# Altium PCB ESP32 with USBC PCB V1I1.PcbDoc (part 3 of 3)
Units mil, origin at the board's own origin, x right, y up, seen from the top; angles counter-clockwise.
Board outline 3020 x 1968.5 mil, 4 copper layers (L1, L2, L3, L4), stack 61.581 mil thick; 65 components, 78 nets, 406 pads, 141 vias.
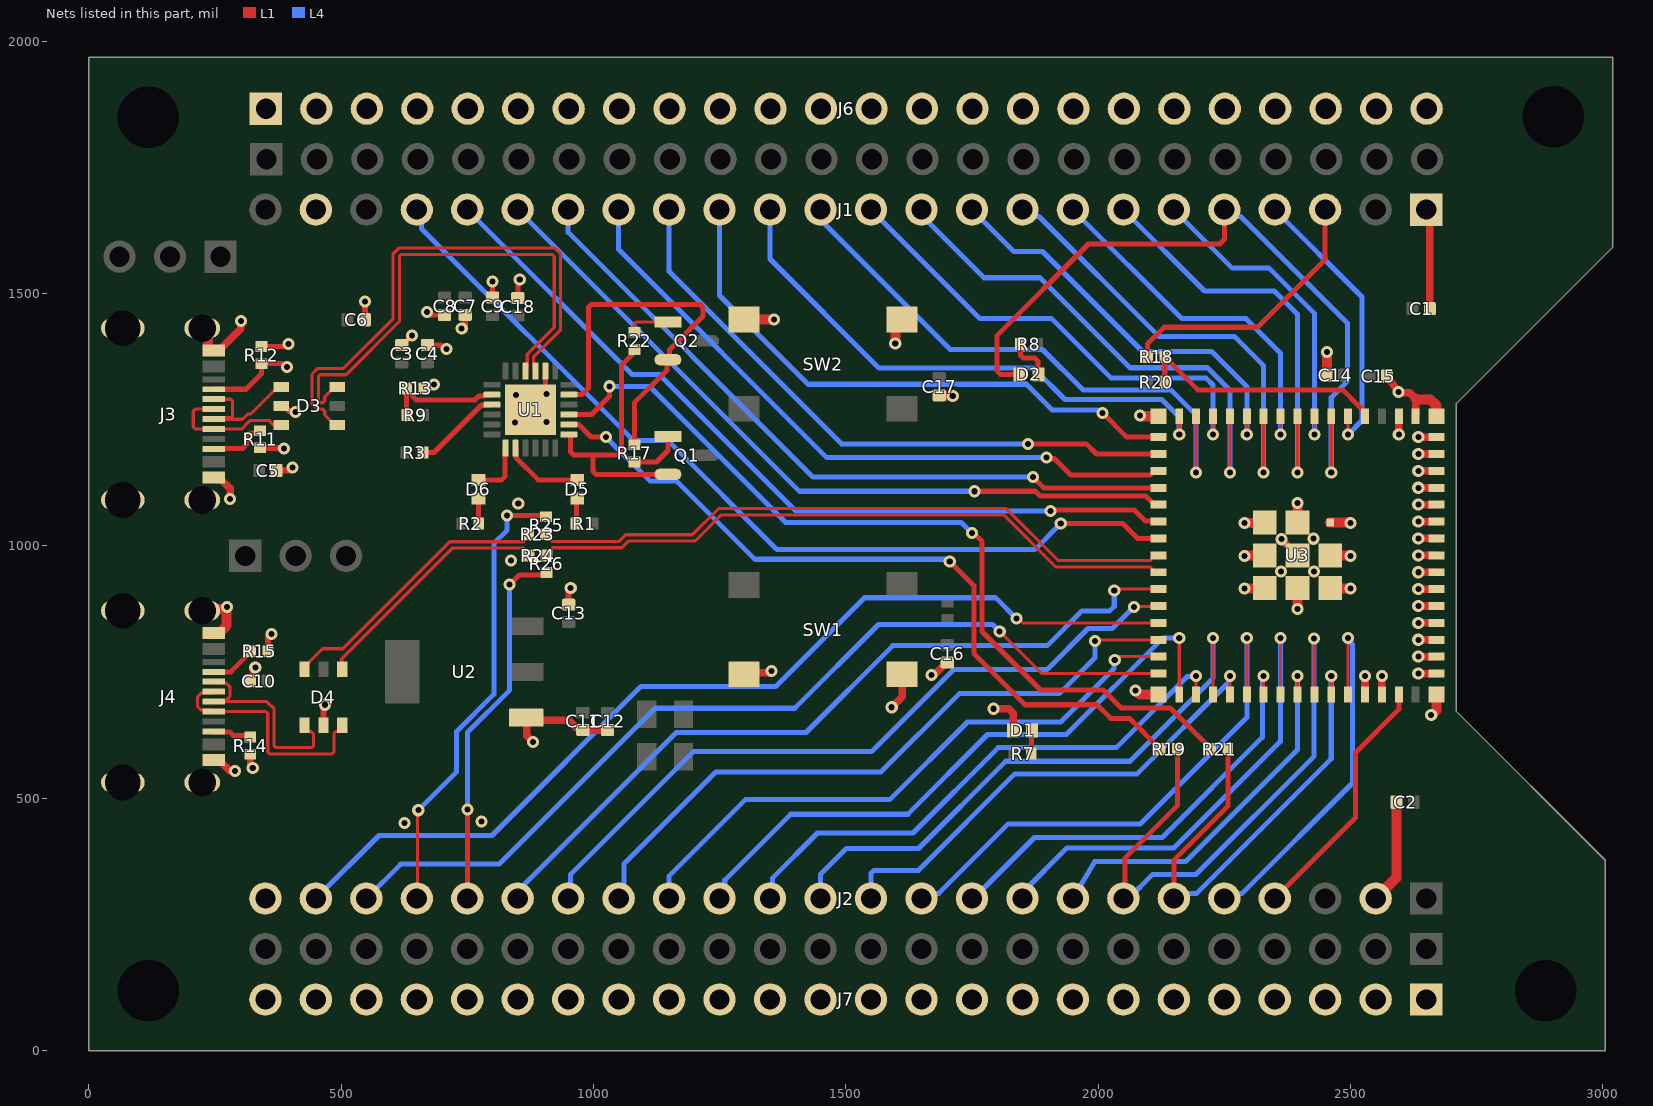
[diagram p4: the nets of this part, all layers, seen from the top]

## Via types
v1: diameter 24, hole 12, L1 to L4, tented both sides, 141 vias

## Nets (pads, with @x,y where several pads share a name; then routed paths per layer and width w, separated by ;. In a path a pad name is that pad's centre, name@x,y a point inside that pad or via, vN(x,y) a via of type N, cw(c..) or ccw(c..) an arc to the next point about the centre after c; other vN are vias at no path point) (continued)
CON2_USB_N: D4.6 R23.1 | length 560.6
  L1 w6.3: D4.6@427.6,755.51 427.6,760.76 463.1,796.26 503.18,796.26 715.15,1008.22 860.82,1008.22 864.51,1011.91 864.51,1015.78 R23.1@871.99,1023.26
CON2_USB_P: D4.4 R24.1 | length 491.7
  L1 w6.3: D4.4@502.4,755.51 501.26,756.65 501.26,776.52 720.37,995.63 861.27,995.63 864.96,991.94 864.96,988.26 R24.1@872.44,980.78
CON_ESP_USB_N: J2.21 R25.1 | length 910.7
  L1 w6.3: J2.21@650,301.26 651.5,302.76 651.5,474.76 v1(653,476.26)
  L1 w10: v1(829,1060.26) 899.33,1060.26 R25.1@906.15,1057.82
  L4 w10: v1(653,476.26) 729,552.26 729,632.26 802.7,705.96 802.7,1004.96 829,1031.26 v1(829,1060.26)
CON_ESP_USB_P: J2.20 R26.1 | length 739
  L1 w6.3: R26.1@898.34,942.26 R26.1@907,947.25
  L1 w10: J2.20@750,301.26 750.25,301.51 750.25,477.51 v1(750.5,477.76) ; v1(834,923.26) 834.18,923.26 853.18,942.26 R26.1@898.34,942.26
  L4 w10: v1(750.5,477.76) 750.5,630.71 834,714.21 v1(834,923.26)
CON_GPIO0: J1.3 R18.1 | length 545.8
  L1 w10: R18.1@2097.99,1374.61 2097.99,1400.25 2131,1433.26 2316,1433.26 2450,1567.26 J1.3@2450,1666.26
DTR_FTDI: Q2.2 R17.2 U1.23 | length 764.9
  L1 w10: U1.23@951.34,1299.61 951.46,1299.72 977.46,1299.72 990,1312.26 990,1472.26 996,1478.26 1211.14,1478.26 1217,1472.4 1217,1455.26 1151,1389.26 1151,1374.64 1150.03,1374.64 1146.06,1370.67 1146.06,1348.45 1081,1283.4 R17.2@1081,1200.27
ESP_USB_N: D4.1 J4.A7 J4.B7 | length 397.1
  L1 w6.3: J4.A7@247.64,691.5 272.61,691.5 352.76,691.5 367.23,677.03 367.23,604.15 370.92,600.46 441.86,600.46 445.55,604.15 445.55,627.06 439.7,632.91 434.45,632.91 427.6,639.76 D4.1@427.6,645.01 ; J4.B7@247.64,730.87 250.39,728.11 272.61,728.11 279.72,721 279.72,701.36 272.61,694.25
ESP_USB_P: D4.3 J4.A6 J4.B6 | length 475.2
  L1 w6.3: J4.A6@247.64,711.18 244.88,708.43 222.66,708.43 215.55,701.32 215.55,681.68 222.66,674.57 244.88,674.57 J4.B6@247.64,671.81 350.94,671.81 354.63,668.12 354.63,591.55 358.32,587.86 482.19,587.86 485.88,591.55 485.88,628.74 490.05,632.91 495.55,632.91 502.4,639.76 D4.3@502.4,645.26
FTDI_USB_N: D3.6 U1.4 | length 1000.4
  L1 w6.3: D3.6@492.25,1314.66 487,1314.66 467.55,1295.21 467.55,1287.25 463.86,1283.56 458.64,1283.56 454.95,1287.25 454.95,1335.31 458.64,1339 510,1339 615.6,1444.6 615.6,1573.71 619.29,1577.4 918.71,1577.4 922.4,1573.71 922.4,1433.32 868.86,1379.78 868.86,1363.53 868.07,1362.75 868.07,1349.02 U1.4@865.32,1346.26
FTDI_USB_P: D3.4 U1.3 | length 1063
  L1 w6.3: D3.4@492.25,1239.86 487,1239.86 467.55,1259.31 467.55,1267.27 463.86,1270.96 453.42,1270.96 442.35,1282.03 442.35,1340.53 453.42,1351.6 504.78,1351.6 603,1449.82 603,1578.93 614.07,1590 923.93,1590 935,1578.93 935,1428.1 881.46,1374.56 881.46,1363.53 882.24,1362.75 882.24,1349.02 U1.3@885,1346.26
GND: C1.1 C2.1 C3.1 C4.1 C5.1 C6.1 C7.1 C8.1 C9.1 C10.1 C11.1 C12.1 C13.1 C14.1 C15.1 C16.1 C17.1 C18.1 D1.1 D3.2 D4.2 J1.1 J1.23 J2.2 J2.24 J3.A1B12 J3.B1A12 J3.S1 J3.S2 J3.S3 J3.S4 J4.A1B12 J4.B1A12 J4.S1 J4.S2 J4.S3 J4.S4 J6.1 J6.2 J6.3 J6.4 J6.5 J6.6 J6.7 J6.8 J6.9 J6.10 J6.11 J6.12 J6.13 J6.14 J6.15 J6.16 J6.17 J6.18 J6.19 J6.20 J6.21 J6.22 J6.23 J6.24 J7.1 J7.2 J7.3 J7.4 J7.5 J7.6 J7.7 J7.8 J7.9 J7.10 J7.11 J7.12 J7.13 J7.14 J7.15 J7.16 J7.17 J7.18 J7.19 J7.20 J7.21 J7.22 J7.23 J7.24 R11.1 R12.1 R13.1 R14.1 R15.1 SW1.3 SW1.4 SW2.3 SW2.4 U1.2 U1.25 U2.1 U3.1 U3.2 U3.42 U3.43 U3.46 U3.47 U3.48 U3.49 U3.50 U3.51 U3.52 U3.53 U3.54 U3.55 U3.56 U3.57 U3.58 U3.59 U3.60 U3.61 U3.62 U3.63 U3.64 U3.65 U3.66 U3.67 U3.68 U3.69 U3.70 U3.71 U3.72 U3.73 | length 3429.1
  L1 w10: R12.1@342,1395.01 387.22,1395.01 392.21,1400 v1(396,1400) ; C3.1@620.16,1398.2 621.54,1398.2 v1(640.16,1416.83) ; R13.1@664.01,1312.02 678.14,1312.02 684,1317.88 v1(684,1320.02) ; v1(670,1463.7) 676.2,1457.5 C8.1@705,1457.5 ; C4.1@671.16,1398.2 697.16,1398.2 705.37,1390 v1(709.16,1390) ; v1(739,1430.7) 746,1437.7 C7.1@746,1457.5 ; v1(800,1524) 800.16,1523.84 C9.1@800.16,1491.91 ; C18.1@850.16,1490.91 850.16,1524.16 v1(854,1528) ; U1.25@904.69,1303.57 U1.2@904.69,1346.26
  L1 w12: C10.1@319.8,732.26 325.61,738.07 325.61,754.87 v1(330,759.26) ; R14.1@320,587.25 320,565.26 v1(325,560.26) ; R11.1@339.65,1194.25 340.15,1193.76 386.5,1193.76 v1(387,1193.26) ; R15.1@355.01,791.26 355.01,818.27 v1(362,825.26) ; C5.1@372.2,1149.26 398,1149.26 v1(404,1155.26) ; D3.2@387.25,1277.51 387.25,1277.01 396.96,1267.3 407.7,1267.3 v1(410,1265) ; D4.2@465,650.51 465,682.26 v1(468,685.26) ; C6.1@547.2,1448.26 v1(547.2,1483.96) ; C13.1@951,883.46 951,912.26 v1(955,916.26)
  L1 w15: J4.B1A12@247.64,575.35 258.46,575.35 279.56,554.26 v1(290,554.26) ; J3.B1A12@247.64,1135.2 251.95,1130.89 262.78,1130.89 280,1113.66 v1(280,1093) ; J3.A1B12@258.46,1387.17 301.23,1429.94 v1@301.23,1444.49 ; v1(880,611.26) 880,612.2 868,624.2 868,658.77 U2.1@867.06,659.71 872.23,654.54 951.14,654.54 966.31,639.37 974.69,639.37 C11.1@979,635.06 C12.1@1028,635.06 ; U1.25@904.69,1303.57 v1(907,1301.26) ; SW1.3@1298.5,745.68 1301.18,748.35 1346.66,748.35 1348.84,750.54 v1@1351.28,748.1 ; v1(1591,680.26) 1611.5,700.76 SW1.4@1611.5,745.68 ; v1(1670,744.26) 1671.72,745.98 1676.55,745.98 1699.62,769.06 C16.1@1701,769.06 ; v1(1792.72,677.32) 1822.81,677.32 1831.6,668.53 D1.1@1831.6,634.26 ; v1(2363,1013.26) U3.61@2395,981.26 ; U3.42@2528.86,705.67 v1(2528.86,741.87) ; U3.43@2562.32,705.67 v1(2562.32,741.87) ; C15.1@2572.2,1334.88 2576.52,1330.57 v1(2595,1305.26) 2596.72,1303.54 2617.19,1303.54 2629.25,1291.47 U3.1@2629.25,1256.85 ; v1(2595.79,1220.65) U3.2@2595.79,1256.85 ; v1(2634.39,747.01) U3.46@2670.59,747.01 ; v1(2634.39,780.47) U3.47@2670.59,780.47 ; v1(2634.39,813.94) U3.48@2670.59,813.94 ; v1(2634.39,847.4) U3.49@2670.59,847.4 ; v1(2634.39,880.87) U3.50@2670.59,880.87 ; v1(2634.39,914.33) U3.51@2670.59,914.33 ; v1(2634.39,947.8) U3.52@2670.59,947.8 ; v1(2634.39,981.26) U3.53@2670.59,981.26 ; v1(2634.39,1014.72) U3.54@2670.59,1014.72 ; v1(2634.39,1048.19) U3.55@2670.59,1048.19 ; v1(2634.39,1081.65) U3.56@2670.59,1081.65 ; v1(2634.39,1115.12) U3.57@2670.59,1115.12 ; v1(2634.39,1148.58) U3.58@2670.59,1148.58 ; v1(2634.39,1182.05) U3.59@2670.59,1182.05 ; v1(2634.39,1215.51) U3.60@2670.59,1215.51 ; J1.1@2650,1666.26 2657.2,1659.06 C1.1@2657.2,1470.26
  L1 w20: J4.S1@225,871.42 228.71,875.12 268.78,875.12 272.92,879.26 v1(274,879.26) 273.23,878.49 273.23,842.09 258.46,827.32 J4.A1B12@247.64,827.32 ; J3.S1@225,1431.26 227.37,1431.26 236.32,1422.31 236.32,1388.98 238.13,1387.17 J3.A1B12@247.64,1387.17 J3.A1B12@258.46,1387.17 ; v1@301.23,1444.49 v1(302,1445.26) ; SW2.4@1298.5,1454.84 1304.8,1448.55 1357.71,1448.55 v1(1358,1448.26) ; v1(1598,1401.26) 1598,1402.34 1598.88,1403.22 1598.88,1436.23 SW2.3@1611.5,1448.84 ; C17.1@1685,1298.26 1685.5,1297.76 1711.5,1297.76 v1(1712,1297.26) ; v1(2074,713.26) 2075.08,713.26 2082.67,705.67 U3.64@2119.41,705.67 ; v1(2083,1258.26) 2084.41,1256.85 U3.63@2119.41,1256.85 ; v1(2290,915.26) 2290.52,915.78 2329.52,915.78 U3.73@2330.04,916.3 ; v1(2290,980.26) 2290.5,980.76 2329.54,980.76 U3.72@2330.04,981.26 ; v1(2290,1045.26) 2290.48,1045.74 2329.56,1045.74 U3.71@2330.04,1046.22 ; v1(2395,875.26) U3.70@2395,916.3 ; U3.69@2395,1046.22 v1(2395,1085.26) ; C14.1@2452.8,1338.26 2453.9,1339.36 v1(2453.9,1384.16) ; U3.68@2459.96,916.3 2460.48,915.78 2499.48,915.78 v1(2500,915.26) ; U3.67@2459.96,981.26 2460.46,980.76 2499.5,980.76 v1(2500,980.26) ; U3.66@2459.96,1046.22 2460.16,1046.03 2499.23,1046.03 v1(2500,1045.26) ; J2.2@2550,301.26 2590.98,342.24 C2.1@2590.98,492.13 ; 2629.25,1291.47 2630.47,1290.26 2658.28,1290.26 2670,1278.54 2670,1257.44 U3.62@2670.59,1256.85 ; v1(2660,665.26) 2661.8,665.26 2670.59,674.05 U3.65@2670.59,705.67
  other v1: 626,451.26 778,454.26 1353,752.26 2362,949.26 2428,949.26 837,971.26 2427,1014.26 851,1084.26 845,1244.26 907,1245.26 847,1299.26
GPIO0: R18.2 R20.2 U3.4 | length 500.5
  L1 w10: R20.2@2132.01,1324.61 R18.2@2132.01,1374.61 2197.35,1309.26 2484.81,1309.26 2516.14,1277.93 2516.14,1277.44 2528.86,1264.72 U3.4@2528.86,1256.85
GPIO1: J1.4 U3.5 | length 564.9
  L1 w6: v1(2495.39,1220.65) U3.5@2495.39,1256.85
  L4 w10: J1.4@2350,1666.26 2523,1493.26 2523,1248.26 v1(2495.39,1220.65)
GPIO2: D2.1 J1.5 U3.6 | length 1463.7
  L1 w6: v1(2461.93,1145.26) U3.6@2461.93,1256.85
  L1 w10: D2.1@1844.3,1339.91 1806.35,1339.91 1800,1346.26 1800,1417.26 1981,1598.26 2241,1598.26 2250,1607.26 J1.5@2250,1666.26
  L4 w10: J1.5@2250,1666.26 2264.61,1666.26 2278.35,1652.53 2282.73,1652.53 2494,1441.26 2494,1326.26 2461.93,1294.19 v1(2461.93,1145.26)
GPIO3: J1.6 U3.7 | length 639.9
  L1 w6: v1(2428.46,1220.65) U3.7@2428.46,1256.85
  L4 w10: J1.6@2150,1666.26 2266,1550.26 2339,1550.26 2428.46,1460.8 v1(2428.46,1220.65)
GPIO4: J1.7 U3.8 | length 856.3
  L1 w6: v1(2395,1145.26) U3.8@2395,1256.85
  L4 w10: J1.7@2050,1666.26 2211,1505.26 2349,1505.26 2395,1459.26 v1(2395,1145.26)
GPIO5: J1.8 U3.9 | length 726.7
  L1 w6: v1(2361.54,1220.65) U3.9@2361.54,1256.85
  L4 w10: J1.8@1950,1666.26 2166,1450.26 2293,1450.26 2361.54,1381.72 v1(2361.54,1220.65)
GPIO6: J1.9 U3.10 | length 929.6
  L1 w6: v1(2328.07,1145.26) U3.10@2328.07,1256.85
  L4 w10: J1.9@1850,1666.26 1864.61,1666.26 1878.35,1652.53 1882.73,1652.53 2120,1415.26 2270,1415.26 2328.07,1357.19 v1(2328.07,1145.26)
GPIO7: J1.10 U3.11 | length 821
  L1 w6: v1(2294.61,1220.65) U3.11@2294.61,1256.85
  L4 w10: J1.10@1750,1666.26 1833,1583.26 1890,1583.26 2088,1385.26 2225,1385.26 2294.61,1315.65 v1(2294.61,1220.65)
GPIO8: J1.11 U3.12 | length 1040.5
  L1 w6: v1(2261.14,1145.26) U3.12@2261.14,1256.85
  L4 w10: J1.11@1650,1666.26 1650,1655.26 1774,1531.26 1885,1531.26 2063.31,1352.95 2216.52,1352.95 2261.14,1308.33 v1(2261.14,1145.26)
GPIO9: J1.12 U3.13 | length 955.9
  L1 w6: v1(2227.68,1220.65) U3.13@2227.68,1256.85
  L4 w10: J1.12@1550,1666.26 1766,1450.26 1908,1450.26 2026,1332.26 2214.17,1332.26 2227.68,1318.75 v1(2227.68,1220.65)
GPIO10: J1.13 U3.14 | length 1150
  L1 w6: v1(2194.21,1145.26) U3.14@2194.21,1256.85
  L4 w10: J1.13@1450,1666.26 1460.33,1655.93 1460.33,1635.93 1707,1389.26 1890,1389.26 1970,1309.26 2144,1309.26 2194.21,1259.05 v1(2194.21,1145.26)
GPIO11: J1.14 U3.15 | length 1109.3
  L1 w6: v1(2160.75,1220.65) U3.15@2160.75,1256.85
  L4 w10: J1.14@1350,1666.26 1350,1568.26 1566,1352.26 1872.4,1352.26 1934.4,1290.26 2126,1290.26 2160.75,1255.51 v1(2160.75,1220.65)
GPIO12: J1.15 U3.16 | length 1156.5
  L1 w10: v1(2009,1263.26) 2056.75,1215.51 U3.16@2119.41,1215.51
  L4 w10: J1.15@1250,1666.26 1250,1496.26 1312.7,1433.56 1312.7,1432.61 1425.05,1320.26 1702.05,1320.26 1702.35,1320.56 1721.65,1320.56 1721.95,1320.26 1858,1320.26 1909,1269.26 1999.21,1269.26 2005.21,1263.26 v1(2009,1263.26)
GPIO13: J1.16 U3.17 | length 1241.7
  L1 w10: v1(1861,1202.26) 1976.62,1202.26 1996.83,1182.05 U3.17@2119.41,1182.05
  L4 w10: J1.16@1150,1666.26 1150,1543.76 1491.5,1202.26 v1(1861,1202.26)
GPIO14: J1.17 U3.18 | length 1337.3
  L1 w10: v1(1898,1175.26) 1900.59,1172.67 1913.59,1172.67 1946,1140.26 2103.21,1140.26 2111.54,1148.58 U3.18@2119.41,1148.58
  L4 w10: J1.17@1050,1666.26 1050,1587.26 1462.41,1174.85 1897.59,1174.85 v1(1898,1175.26)
GPIO15: J1.18 U3.19 | length 1424.1
  L1 w10: v1(1871,1136.26) 1892.14,1115.12 U3.19@2119.41,1115.12
  L4 w10: J1.18@950,1666.26 950,1621.26 1435,1136.26 v1(1871,1136.26)
GPIO16: J1.19 U3.20 | length 1511.6
  L1 w10: v1(1755,1108.26) 1875.95,1108.26 1885.39,1098.82 2094.37,1098.82 2111.54,1081.65 U3.20@2119.41,1081.65
  L4 w10: J1.19@850,1666.26 1408,1108.26 v1(1755,1108.26)
GPIO17: J1.20 U3.21 | length 1627.1
  L1 w10: v1(1906,1069.26) 1908,1071.26 2071.53,1071.26 2093.53,1049.26 2118.34,1049.26 U3.21@2119.41,1048.19
  L4 w10: J1.20@750,1666.26 1076.7,1339.56 1130.7,1339.56 1401,1069.26 v1(1906,1069.26)
GPIO18: J1.21 U3.22 | length 1798.7
  L1 w10: v1(1926,1044.26) 2048.83,1044.26 2078.37,1014.72 U3.22@2119.41,1014.72
  L4 w10: J1.21@650,1666.26 659.1,1657.16 659.1,1628.9 1078.74,1209.26 1147,1209.26 1363.7,992.56 1874.3,992.56 v1(1926,1044.26)
GPIO21: J2.19 U3.25 | length 1550.3
  L1 w6: v1(2032,911.26) 2035.07,914.33 U3.25@2119.41,914.33
  L4 w10: J2.19@850,301.26 850,315.87 865.73,331.61 865.73,331.99 1164,630.26 1421,630.26 1593,802.26 1899,802.26 1968,871.26 2023,871.26 2032,880.26 v1(2032,911.26)
GPIO26: J2.18 U3.26 | length 1434.7
  L1 w6: v1(2071,879.26) 2071.8,880.06 2118.61,880.06 U3.26@2119.41,880.87
  L4 w10: J2.18@950,301.26 954.14,305.4 954.14,348.4 1198,592.26 1550.95,592.26 1713.95,755.26 1899,755.26 1979.87,836.13 2027.87,836.13 v1(2071,879.26)
GPIO33: J2.17 U3.28 | length 1335.1
  L1 w6: v1(1994,811.26) 1996.68,813.94 U3.28@2119.41,813.94
  L4 w10: J2.17@1050,301.26 1060.23,311.49 1060.23,369.49 1243,552.26 1570,552.26 1725,707.26 1923,707.26 1994,778.26 v1(1994,811.26)
GPIO34: J2.16 U3.29 | length 1203.6
  L1 w6: v1(2033,774.26) 2039.21,780.47 U3.29@2119.41,780.47
  L4 w10: J2.16@1150,301.26 1150,346.26 1301,497.26 1587,497.26 1741,651.26 1926,651.26 2031.91,757.17 2031.91,773.17 v1(2033,774.26)
GPIO35: J2.15 U3.31 | length 1251.3
  L1 w6: U3.31@2160.75,705.67 v1(2160.75,817.26)
  L4 w10: J2.15@1250,301.26 1260.23,311.49 1260.23,337.49 1391,468.26 1623,468.26 1781,626.26 1937,626.26 2128,817.26 v1(2160.75,817.26)
GPIO36: J2.14 U3.32 | length 1084
  L1 w6: U3.32@2194.21,705.67 v1(2194.21,741.87)
  L4 w10: J2.14@1350,301.26 1355.14,306.4 1355.14,342.4 1444,431.26 1633,431.26 1802,600.26 2036,600.26 2176.82,741.08 2193.42,741.08 v1(2194.21,741.87)
GPIO37: J2.13 U3.33 | length 1177.6
  L1 w6: U3.33@2227.68,705.67 v1(2227.68,817.26)
  L4 w10: J2.13@1450,301.26 1450,349.26 1501,400.26 1644,400.26 1817,573.26 2063,573.26 2227.68,737.94 v1(2227.68,817.26)
GPIO38: J2.12 U3.34 | length 965
  L1 w6: U3.34@2261.14,705.67 v1(2261.14,741.87)
  L4 w10: J2.12@1550,301.26 1550,351.4 1555.86,357.26 1644,357.26 1835,548.26 2077.43,548.26 2258.46,729.29 2258.46,739.19 v1(2261.14,741.87)
GPIO39: J2.11 U3.35 | length 1062.1
  L1 w6: U3.35@2294.61,705.67 v1(2294.61,817.26)
  L4 w10: J2.11@1650,301.26 1660.33,311.59 1684.33,311.59 1822,449.26 2084,449.26 2294.61,659.87 v1(2294.61,817.26)
GPIO40: J2.10 U3.36 | length 866.2
  L1 w6: U3.36@2328.07,705.67 v1(2328.07,741.87)
  L4 w10: J2.10@1750,301.26 1752.92,301.26 1873.92,422.26 2127,422.26 2325.39,620.65 2325.39,739.19 v1(2328.07,741.87)
GPIO41: J2.9 U3.37 | length 963.7
  L1 w6: U3.37@2361.54,705.67 v1(2361.54,817.26)
  L4 w10: J2.9@1850,301.26 1850,313.26 1938,401.26 2150,401.26 2361.54,612.8 v1(2361.54,817.26)
GPIO42: J2.8 U3.38 | length 760.3
  L1 w6: U3.38@2395,705.67 v1(2395,741.87)
  L4 w10: J2.8@1950,301.26 1993.27,374.26 2173,374.26 2395,596.26 v1(2395,741.87)
GPIO45: J2.5 U3.41 | length 751
  L1 w6: U3.41@2495.39,705.67 v1(2495.39,817.26)
  L4 w10: J2.5@2250,301.26 2260.33,311.59 2285.33,311.59 2504,530.26 2504,804.87 2495.39,813.47 v1(2495.39,817.26)
GPIO46: J2.4 U3.44 | length 506.2
  L1 w10: J2.4@2350,301.26 2510,461.26 2510,590.26 2595.79,676.05 U3.44@2595.79,705.67
GPIO47: J2.23 U3.27 | length 1936.9
  L1 w6: v1(1838,856.26) 1841.66,856.26 1850.51,847.4 U3.27@2119.41,847.4
  L4 w10: J2.23@450,301.26 575,426.26 799,426.26 1094,721.26 1361,721.26 1537,897.26 1797,897.26 v1(1838,856.26)
GPIO48: J2.22 U3.30 | length 1834.6
  L1 w6: v1(1805,830.26) 1888.25,747.01 U3.30@2119.41,747.01
  L4 w10: J2.22@550,301.26 618,369.26 813,369.26 1122,678.26 1399,678.26 1565,844.26 1791,844.26 v1(1805,830.26)
NetD1_2: D1.2 R7.1 | length 46.7
  L1 w10: R7.1@1867.31,588.26 1868.15,589.11 1868.15,633.41 D1.2@1869,634.26
NetD2_2: D2.2 R8.1 | length 87.2
  L1 w10: R8.1@1845.99,1399.06 1846.45,1398.6 1846.45,1377.76 1852.3,1371.91 1874.99,1371.91 1880.85,1366.05 1880.85,1340.76 D2.2@1881.7,1339.91
NetD5_2: D5.2 R1.1 | length 50.5
  L1 w10: R1.1@964.99,1044.26 966.5,1045.76 966.5,1092.06 D5.2@968,1093.56
NetD6_2: D6.2 R2.1 | length 49.7
  L1 w10: D6.2@772,1093.56 772.5,1093.06 772.5,1044.76 R2.1@773.01,1044.26
NetJ3_A5: J3.A5 R12.2 | length 180.4
  L1 w10: J3.A5@247.64,1310.39 311.8,1310.39 342,1340.6 R12.2@342,1360.99 382.37,1360.99 388.72,1354.63 v1(392.51,1354.63)
NetJ3_B5: J3.B5 R11.2 | length 115.7
  L1 w10: J3.B5@247.64,1192.28 248.54,1193.19 304.57,1193.19 314,1202.61 314,1217.55 319.86,1223.41 334.8,1223.41 R11.2@339.65,1228.27
NetJ4_A5: J4.A5 R15.2 | length 90.9
  L1 w10: J4.A5@247.64,750.55 281.46,750.55 320.99,790.08 R15.2@320.99,791.26
NetJ4_B5: J4.B5 R14.2 | length 78.6
  L1 w10: J4.B5@247.64,632.44 248.54,631.54 279.31,631.54 286.3,624.54 313.19,624.54 320,617.73 R14.2@320,617.55
NetQ1_1: Q1.1 R17.1 | length 113.1
  L1 w10: R17.1@1081,1166.25 1124.99,1166.25 1147.58,1188.84 1147.58,1210.4 1141.31,1216.66 Q1.1@1134.58,1216.66
NetQ2_1: Q2.1 R22.1 | length 76.8
  L1 w6.3: R22.1@1081,1423.27 1081,1439.97 1084.69,1443.66 Q2.1@1139.58,1443.66
NetR3_1: R3.1 U1.9 | length 176.2
  L1 w10: R3.1@662.14,1185 684,1185 778.02,1279.02 798.07,1279.02 U1.9@798.98,1279.92
RTS_FTDI: Q1.2 R22.2 U1.19 | length 534.7
  L1 w10: U1.19@951.34,1220.87 954.88,1220.87 955,1220.75 955,1186.12 960.86,1180.26 1000.5,1180.26 ; R22.2@1080.19,1382.44 1056,1358.25 1056,1186.12 1050.14,1180.26 1000.5,1180.26 ; Q1.2@1147.58,1141.86 1004.86,1141.86 999,1147.72 999,1178.76 1000.5,1180.26
RXD_FTDI: R19.2 U1.20 | length 1517.2
  L1 w10: U1.20@951.34,1240.55 951.46,1240.43 970.88,1240.43 995.38,1215.94 v1(1024.68,1215.94) ; v1(1706,969.26) 1753.63,921.63 1753.63,786.63 1855,685.26 1997.91,685.26 2024.91,658.26 2061.99,658.26 R19.2@2122.99,597.26
  L4 w10: v1(1024.68,1215.94) 1112.36,1128.26 1165,1128.26 1319.7,973.56 1697.91,973.56 1702.21,969.26 v1(1706,969.26)
RXT: D6.1 U1.13 | length 112.3
  L1 w10: D6.1@772,1130.96 818.2,1130.96 825.04,1137.8 825.04,1192.99 U1.13@825.94,1193.9
TXD_FTDI: R21.2 U1.21 | length 1709.8
  L1 w10: U1.21@951.34,1260.24 951.46,1260.35 996.09,1260.35 1032,1296.26 v1(1032,1316.26) ; v1(1750,1025.26) 1753.79,1025.26 1769.93,1009.12 1769.93,830.33 1886,714.26 2010,714.26 2045.64,678.62 2142.81,678.62 2222.99,598.44 R21.2@2222.99,597.26
  L4 w10: v1(1032,1316.26) 1111,1316.26 1381,1046.26 1729,1046.26 v1(1750,1025.26)
TXT: D5.1 U1.14 | length 159
  L1 w10: U1.14@845.63,1193.9 846.54,1192.99 846.54,1174.92 890.5,1130.96 D5.1@968,1130.96
U0RXD: J2.6 R21.1 U3.40 | length 966.8
  L1 w6: U3.40@2461.93,705.67 v1(2461.93,741.87)
  L1 w10: J2.6@2150,301.26 2150,377.26 2257.01,484.27 R21.1@2257.01,597.26
  L4 w10: J2.6@2150,301.26 2160.33,311.59 2195.33,311.59 2461.93,578.19 v1(2461.93,741.87)
U0TXD: J2.7 R19.1 U3.39 | length 1178.9
  L1 w6: v1(2428,816.26) 2428.23,816.03 2428.23,705.9 U3.39@2428.46,705.67
  L1 w10: J2.7@2050,301.26 2053,304.26 2053,381.26 2157.01,485.27 R19.1@2157.01,597.26
  L4 w10: J2.7@2050,301.26 2060,301.26 2108,349.26 2194,349.26 2428,583.26 v1(2428,816.26)
USB_FTDI_N: D3.1 J3.A7 J3.B7 | length 274.6
  L1 w6.3: J3.B7@247.64,1290.71 281.49,1290.71 285,1287.19 285,1257.76 281.49,1254.24 250.54,1254.24 J3.A7@247.64,1251.34 248.18,1250.8 304.72,1250.8 315.18,1261.26 321.26,1261.26 367.81,1307.81 380.4,1307.81 D3.1@387.25,1314.66
USB_FTDI_P: D3.3 J3.A6 J3.B6 | length 256.2
  L1 w6.3: J3.A6@247.64,1271.02 210.76,1271.02 207,1267.26 207,1235.95 211.3,1231.65 J3.B6@247.64,1231.65 303.39,1231.65 320.4,1248.66 356.6,1248.66 365.4,1239.86 D3.3@377.25,1239.86
USB_N: R23.2 R25.2 U3.23 | length 1296.6
  L1 w6.3: R25.2@906.15,1023.81 907.33,1023.81 914.81,1016.33 914.81,1012.7 918.5,1009.01 1050.9,1009.01 1064.05,1022.16 1196.08,1022.16 1247.87,1073.95 1818.31,1073.95 1921.43,970.83 2103.12,970.83 2106.81,974.52 2106.81,976.54 2111.54,981.26 U3.23@2119.41,981.26
USB_P: R24.2 R26.2 U3.24 | length 1296.1
  L1 w6.3: R26.2@907,981.27 908.18,981.27 915.66,988.75 915.66,992.73 919.35,996.42 1056.12,996.42 1069.26,1009.56 1201.3,1009.56 1253.09,1061.35 1813.09,1061.35 1916.21,958.23 2103.12,958.23 2106.81,954.54 2106.81,952.52 2111.54,947.8 U3.24@2119.41,947.8
VBUS_SENSE: R9.1 R13.2 U1.8 | length 238.6
  L1 w10: R9.1@629.99,1259.02 R13.2@629.99,1312.02 629.99,1310.84 642.08,1298.76 642.08,1295.53 648.7,1288.91 764.86,1288.91 773.08,1297.13 781.79,1297.13 783.37,1298.7 798.07,1298.7 U1.8@798.98,1299.61
pads on no net: J1.24 J3.A8 J3.B8 J4.A8 J4.B8 U1.1 U1.10 U1.11 U1.12 U1.15 U1.16 U1.17 U1.18 U1.22 U1.24

## Polygon pours and split planes (outlines as drawn)
+5V on L1 "+5V_L01_P003" (solid, remove dead copper, pour order 3): 531,1417.26 531,1486.85 582,1531.31 582,1703.26 504.14,1703.26 478,1633.26 472,1624.26 208,1623.26 208,1523.26 418,1523.26 418,1417.26
+5V_VBUS1 on L1 "+5V_VBUS1_L01_P033" (solid, remove dead copper, pour order 33): 121,942 121,1382 120,1383 365,1383 365,942
+3V3_REG on L1 "+3V3_REG_L01_P026" (solid, pour order 26): 540,570.26 1010,570.26 1190,390.26 1220,390.26 1220,840.26 540,840.26
+5V_VBUS1 on L1 "+5V_VBUS1_L01_P037" (solid, remove dead copper, pour order 37): 466,1302 527.12,1302 612,1397 814.01,1397 814.01,1251 466,1251
+5V on L1 "+5V_L01_P035" (solid, remove dead copper, pour order 35): 375,944 375,1217 513,1217 513,944
+5V_VBUS2 on L1 "+5V_VBUS2_L01_P031" (solid, remove dead copper, pour order 31): 553,1014 152,1014 152,587 532,587 553,587
+3V3 on L1 "+3V3_L01_P025" (solid, remove dead copper, pour order 25): 1230,380.26 2031,380.26 2031,820.26 1740,820.26 1740,910.26 1680,910.26 1570,810.26 1540,810.26 1230,810.26
+5V on L1 "+5V_L01_P022" (solid, pour order 22): 700,930.26 700,790.26 700,780.26 1060,780.26 1060,930.26
GND on L1 "GND_L01_P016" (solid, pour order 16): 2262,859.26 2530,859.26 2530,1113.26 2262,1113.26 2262,1093.26
GND on L2 "GND_L02_P028" (solid, remove dead copper, pour order 28): 17,21.26 2693.94,17.26 2693.94,645.26 2693.94,675.72 2696.19,1309.45 2696.19,1953.26 17,1953.26
+3V3 on L2 "+3V3_L02_P018" (solid, pour order 18): 1934.22,526.26 1934,526.04 1934,431.26 2682,431.26 2682,535.26 1934,535.26 1934.22,535.04
+VDC on L2 "+VDC_L02_P021" (solid, pour order 21): 272,1459.26 105,1462.26 103,1706.26 206,1809.26 403,1809.26 403,1719.26 398,1714.26 286,1714.26 286,1678.26 200,1592.26 200,1561.26 271,1490.26 271,1459.26
+3V3 on L2 "+3V3_L02_P019" (solid, pour order 19): 2598.98,263.26 2683,263.26 2683,1513.26 1935,1513.26 1876,1454.26 1876,1341.26 1950.29,1341.26 2480,1341.26 2480,666.26 2596,586.26
+5V on L4 "+5V_L04_P036" (solid, remove dead copper, pour order 36): 780,1506 780,789 362,789 362,1506
+5V_VBUS1 on L4 "+5V_VBUS1_L04_P034" (solid, remove dead copper, pour order 34): 272,1447 574,1447 574,913 272,913 272,1446
GND on L3 "GND_L03_P030" (solid, pour order 30): 17,1953.26 17,50 2700,50 2700,1953.26

## Silkscreen, mask and mechanical layers (free items; w line width, h text height)
Top Overlay:
  lines w6: 851.6,1004.88 851.6,1035.07 851.6,1044.91 ; 888.3,1044.91 888.3,1053.24 888.3,1069.89 888.3,1078.22 ; 889,926.86 889,941.33 889,944.66 889,959.12
  text "+3V3" at 8,1638.26 h25
  text "VDC" at 130,1637.26 h25
  text "+5V" at 235,1636.26 h25
  text "7" at 1762,1601.26 h30 r90
  text "6" at 1862,1601.26 h30 r90
  text "5" at 1962,1601.26 h30 r90
  text "4" at 2062,1601.26 h30 r90
  text "3" at 2167,1601.26 h30 r90
  text "2" at 2262,1601.26 h30 r90
  text "1" at 2362,1601.26 h30 r90
  text "0" at 2462,1601.26 h30 r90
  text "9" at 1562,1596.26 h30 r90
  text "8" at 1667,1596.26 h30 r90
  text "16" at 857,1582.26 h30 r90
  text "15" at 957,1582.26 h30 r90
  text "14" at 1057,1582.26 h30 r90
  text "13" at 1162,1582.26 h30 r90
  text "12" at 1257,1582.26 h30 r90
  text "11" at 1357,1582.26 h30 r90
  text "10" at 1457,1582.26 h30 r90
  text "18" at 666,1577.26 h30 r90
  text "17" at 763,1576.26 h30 r90
  text "5V" at 565,1572.26 h30 r90
  text "NC" at 374,1568.26 h30 r90
  text "GND" at 461,1542.26 h30 r90
  text "3V3" at 2562,1533.26 h30 r90
  text "GND" at 2667,1533.26 h30 r90
  text "1" at 2641.37,1293.26 h20 r90
  text "BOOT/USR" at 1344,1194.26 h30
  text "+5V" at 365,1043.26 h25
  text "RESET" at 1385,966.26 h30
  text "USB1" at 239,941 h25 r90
  text "USB2" at 607,935 h25 r90
  text "ESPereira" at 1908,733.29 h80 r90
  text "GND" at 371,353.26 h30 r90
  text "47" at 471,353.26 h30 r90
  text "48" at 571,353.26 h30 r90
  text "USB-" at 671,353.26 h30 r90
  text "USB+" at 771,353.26 h30 r90
  text "21" at 871,353.26 h30 r90
  text "26" at 971,353.26 h30 r90
  text "33" at 1071,353.26 h30 r90
  text "34" at 1171,353.26 h30 r90
  text "35" at 1271,353.26 h30 r90
  text "36" at 1371,353.26 h30 r90
  text "37" at 1471,353.26 h30 r90
  text "38" at 1571,353.26 h30 r90
  text "39" at 1671,353.26 h30 r90
  text "40" at 1771,353.26 h30 r90
  text "41" at 1871,353.26 h30 r90
  text "42" at 1971,353.26 h30 r90
  text "TXD" at 2071,353.26 h30 r90
  text "RXD" at 2171,353.26 h30 r90
  text "45" at 2271,353.26 h30 r90
  text "46" at 2371,353.26 h30 r90
  text "EN" at 2475,353.26 h30 r90
  text "GND" at 2571,353.26 h30 r90
  text "3V3" at 2671,353.26 h30 r90
Bottom Overlay:
  drawing of 11 lines, arcs and shapes, not listed
Board Shape:
  lines w19.68: 0,0 3005,0 3005,377.13 2710,672.13 2710,1282.26 3020,1592.26 3020,1729.41 3020,1968.5 0,1968.5 0,0

## Text inside footprints (layer, text, board x,y; h text height)
D3: Top 3D Body "*" at 405,1284.26 h50
D4: Top 3D Body "*" at 458,668.26 h50 r90